# Altium PCB CT310高端控制盒基板电路V1.0.PcbDoc (part 8 of 8)
Units mil, origin at the board's own origin, x right, y up, seen from the top; angles counter-clockwise.
Board outline 8162.61 x 6196.81 mil, 2 copper layers (Top Layer, Bottom Layer), stack 65.792 mil thick; 265 components, 178 nets, 926 pads, 298 vias.
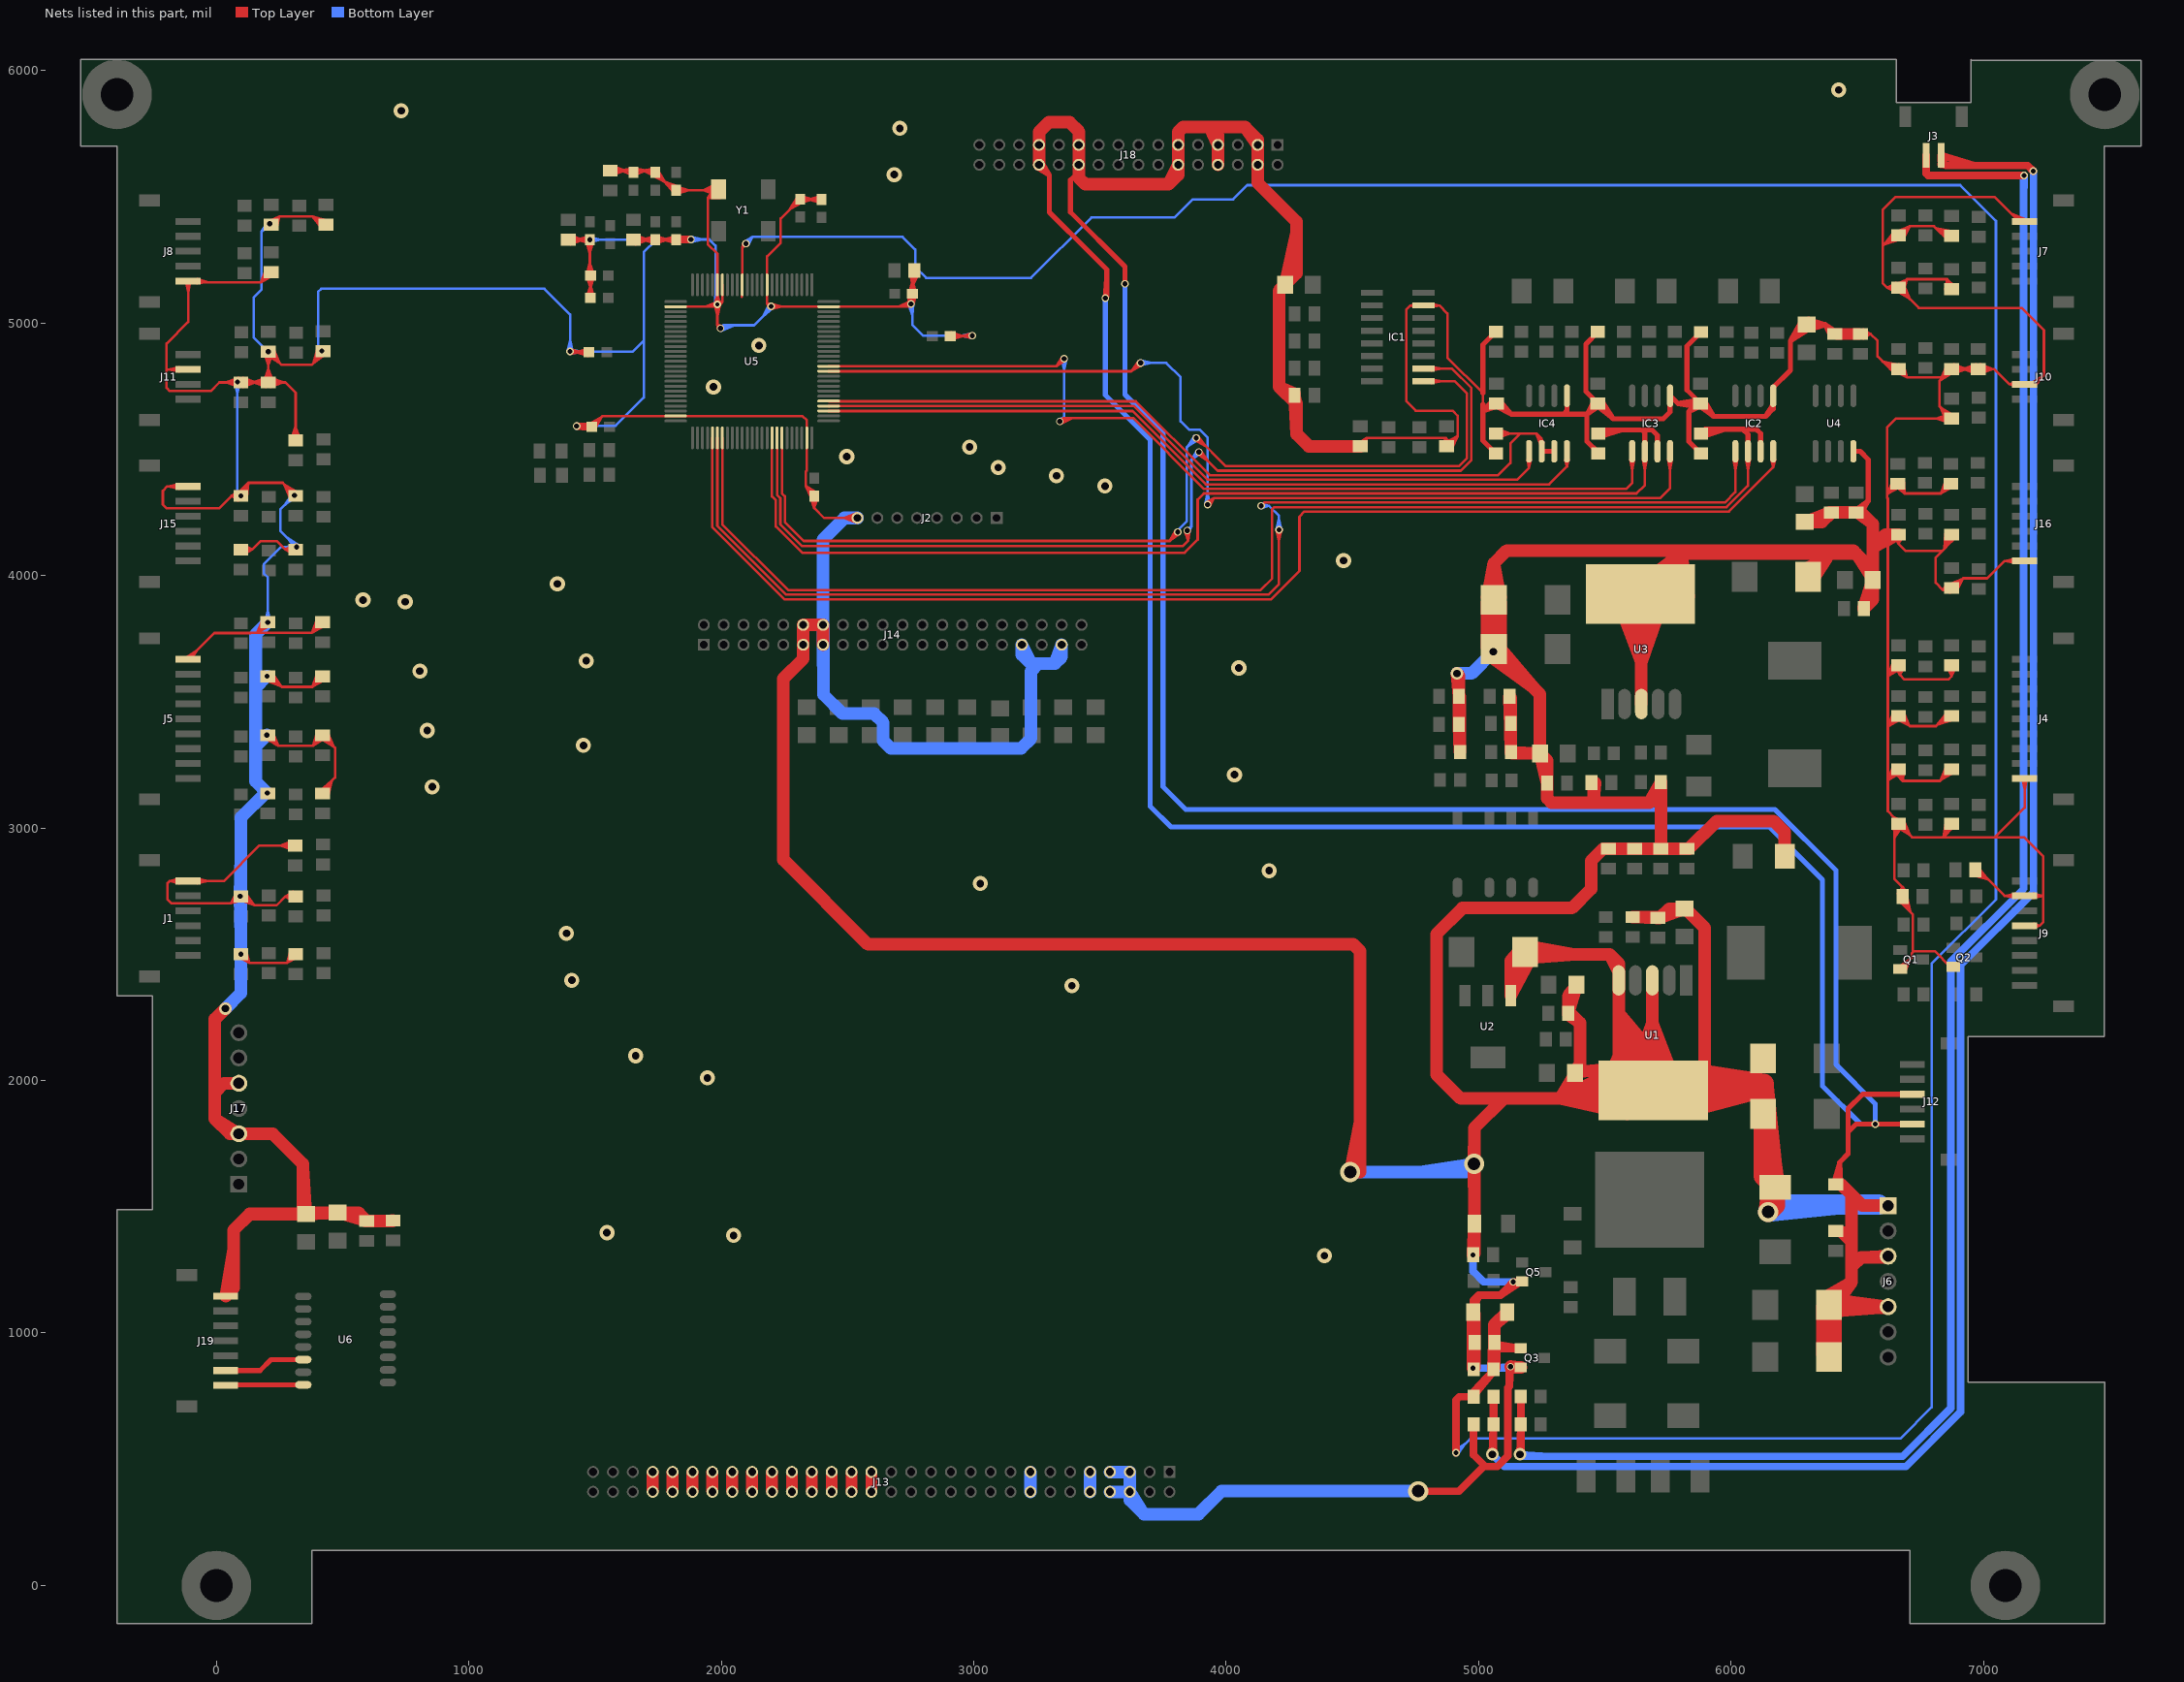
[diagram p8: the nets of this part, all layers, seen from the top]

## Via types
v1: diameter 30, hole 20, Top Layer to Bottom Layer, tented both sides, 226 vias
v2: diameter 60, hole 30, Top Layer to Bottom Layer, tented both sides, 32 vias
v3: diameter 50, hole 30, Top Layer to Bottom Layer, tented both sides, 20 vias
v4: diameter 80, hole 50, Top Layer to Bottom Layer, tented both sides, 10 vias
v5: diameter 50, hole 28, Top Layer to Bottom Layer, tented both sides, 8 vias
v6: diameter 24, hole 16, Top Layer to Bottom Layer, tented both sides, 1 vias
v7: diameter 30, hole 16, Top Layer to Bottom Layer, tented both sides, 1 vias

## Nets (pads, with @x,y where several pads share a name; then routed paths per layer and width w, separated by ;. In a path a pad name is that pad's centre, name@x,y a point inside that pad or via, vN(x,y) a via of type N, cw(c..) or ccw(c..) an arc to the next point about the centre after c; other vN are vias at no path point) (continued)
SGND: (continued)
  Top Layer w50: 68,1328.8 J19.7@36.77,1146.17 ; J17.5@89,1989 30,1989 -6,1953 ; 169.74,1471.02 R1.2@351.24,1471.02 ; 343,1655.06 R1.2@355.17,1471.02 ; C85.2@700,1445.37 C85.2@698,1443.37 ; J14.13@2403.29,3725.69 J14.14@2403.29,3804.43 J14.12@2324.55,3804.43 J14.11@2324.55,3725.69 ; J18.26@3258.48,5626.93 J18.25@3258.48,5705.67 3258.48,5756.48 3297,5795 3380,5795 3417,5758 ; J18.8@3967.15,5626.93 J18.7@3967.15,5705.67 ; C107.2@4270.58,4720.2 4209,4748 ; 4278,5354.59 C112.1@4233.18,5156.23 ; 4351.77,4511.86 C109.2@4525.39,4511.86 ; 4531,1842.29 v4(4491,1637) 4531,1637 4531,2512 4504,2539 2581,2539 2246,2874 2246,3592 2324.55,3670.55 ; C109.2@4531.3,4511.86 4327.14,4511.86 4279,4560 ; D5.1@4978.37,1082.3 D5.1@4983.93,1076.74 ; 4978.72,1025.5 v1(4977.3,860.3) ; D6.1@4983.37,1441.17 4983.37,1618.73 v4(4982,1670) ; 4983.74,1025.39 v1(4977.3,860.3) ; 4983.93,1026.59 v1(4977.3,860.3) ; C72.2@5033.91,3714.95 C70.2@5033.9,3893.58 ; C72.2@5033.9,3718.71 C70.2@5060.02,3903.3 ; C72.2@5033.91,3718.79 C70.2@5060.02,3895.42 ; C70.2@5033.95,3913.67 5060.02,4048.02 ; C72.2@5034.47,3722.59 C70.2@5086.13,3893.58 ; C70.2@5036.91,3872.27 v3(5058,3698) ; C70.2@5036.92,3873.15 v3(5058,3698) ; C72.2@5043.43,3680.87 5218.72,3554.28 ; C72.2@5060.02,3701.13 5218.72,3554.28 ; C70.2@5060.02,3911.17 5060.02,4048.02 ; C72.2@5066.5,3706.5 5243.18,3529.82 C73.2@5243.18,3295.3 ; C72.2@5078.93,3719.23 5218.72,3554.28 ; C70.2@5082.87,3871.52 v3(5058,3698) ; C70.2@5083,3871.47 v3(5058,3698) ; C70.2@5086.08,3913.67 5060.02,4048.02 ; C70.2@5086.13,3883.02 v3(5058,3698) ; C17.2@5122.07,3521.3 C17.2@5128.07,3515.3 ; 5123.37,3477.91 R27.1@5128.07,3304.23 ; 5128.07,3477.85 R27.1@5128.07,3304.23 ; C7.2@5158.66,2507.79 U2.1@5126.85,2335.34 ; C7.2@5158.9,2508.64 U2.1@5126.85,2356.01 ; C7.2@5183.98,2509 5385.96,2498.3 ; C7.2@5184.29,2482.82 5385.96,2498.3 ; C7.2@5187.06,2535 5385.96,2498.3 ; 5195.3,3575.95 v3(5058,3698) ; 5197.39,3569.68 v3(5058,3698) ; 5197.53,3575.47 v3(5058,3698) ; C7.2@5198,2536 5235.7,2498.3 ; 5203.96,3571.7 v3(5058,3698) ; C7.2@5207.45,2489.52 U2.1@5126.85,2356.01 ; C7.2@5208.03,2490.77 U2.1@5126.85,2335.34 ; C73.2@5243.18,3299.23 5243.18,3480.73 ; C74.1@5270.93,3172.39 5270.93,3117.67 ; C4.2@5381.12,2029 5381.12,1950.18 ; C4.2@5381.12,2032.94 5565.85,2050.4 5323.57,1928.3 ; C4.2@5392.41,2052.3 5401.79,2061.67 5401.79,2227.8 ; C6.2@5392.41,2372.3 5355.01,2334.89 ; 5399,1932.3 5381.12,1950.18 ; C75.1@5455.93,3178.3 5455.93,3112.67 ; C75.1@5460.63,3178.09 5455.93,3112.67 ; U3.0@5549.69,3908.6 5644.51,3657.76 ; 5554.63,2186.3 U1.5@5554.63,2361.3 ; U1.0@5584.24,2003.53 5323.57,1928.3 ; U1.0@5588.17,1868.3 5323.57,1928.3 ; U1.0@5594.7,1918.22 5323.57,1928.3 ; U3.0@5598.25,3921.9 5644.51,3657.76 ; U1.0@5599.41,1976.32 5687.96,2229.43 ; U1.0@5601.86,1935.39 5554.63,2265.77 ; U3.3@5644.51,3490.9 5644.51,3922.57 U3.0@5641.17,3925.9 ; U3.3@5644.51,3525.9 5644.51,3700.9 ; U1.0@5648.28,1964.23 5687.96,2229.43 ; U1.0@5650.91,1946.22 5554.63,2265.77 ; U3.0@5665.13,3981.79 5802.33,4087.06 ; U3.0@5684.18,3922.97 5644.51,3657.76 ; 5687.96,2186.3 U1.3@5687.96,2361.3 ; U1.3@5687.96,2396.3 U1.0@5687.96,1964.63 ; U3.0@5701.69,3946.42 5802.33,4087.06 ; U1.0@5709.3,1979.3 5849,1979.3 5896,2026.3 5896,2604.07 ; C14.1@5721.63,2917.67 5721.67,3145.67 ; 5721.67,3004.74 R36.2@5721.67,3178.36 ; 5721.67,3091.29 C14.1@5721.63,2917.67 ; R36.2@5721.67,3182.3 5721.67,3145.67 ; U1.0@5729.4,1981.45 5554.63,2265.77 ; U3.0@5733.06,3910.87 5644.51,3657.76 ; U1.0@5734.22,1965.29 5687.96,2229.43 ; U3.0@5739.6,3925.9 5802.33,4087.06 ; U1.0@5770.09,2010.9 5554.63,2265.77 ; U3.0@5781.41,3915.39 5802.33,4087.06 ; U1.0@5782.78,1978.6 5687.96,2229.43 ; C2.1@5820.23,2680.41 5896,2604.07 ; C13.1@5831.2,2917.67 5943.51,3027.51 ; U3.0@5832.26,3916.73 5802.33,4087.06 ; D7.1@6211.97,2887.3 6211.97,2984.03 ; D7.1@6211.97,2897.14 6211.97,2984.03 ; C8.2@6290.43,4024.64 6376.3,4066.3 ; C8.2@6296.34,3986.34 6376.3,4066.3 ; C8.2@6304.98,4002.87 6376.3,4066.3 ; C8.2@6324.9,3985.88 6376.3,4066.3 ; C19.2@6361.16,1101.62 C20.2@6387.28,912.87 ; C19.2@6361.16,1101.69 C20.2@6387.28,905 ; C19.2@6361.16,1105.22 C20.2@6361.16,914.6 ; C19.2@6361.65,1098.06 C20.2@6413.4,914.6 ; C19.2@6371.83,1140.31 6476.82,1200.84 ; C19.2@6387.28,1119.17 6476.82,1200.84 ; C19.2@6387.51,1085.12 J6.5@6589.42,1100 ; C19.2@6390.43,1137.29 J6.5@6589.42,1100 ; C20.2@6392.13,909.85 C20.2@6396.98,905 ; C19.2@6398.57,1100 J6.5@6617,1100 ; C19.2@6406.91,1101.84 6476.82,1200.84 ; C19.2@6412.91,1098.06 C20.2@6361.16,914.6 ; C19.2@6413.4,1101.62 C20.2@6387.28,912.87 ; C19.2@6413.4,1105.22 C20.2@6413.4,914.6 ; C19.2@6413.4,1101.69 C20.2@6387.28,905 ; C22.1@6414.3,1588.67 6435.37,1588.67 6476.82,1547.22 ; C19.2@6433.28,1129.26 J6.5@6622,1104 ; C19.2@6434.54,1108.65 J6.5@6622,1104 ; C19.2@6438.25,1088.86 J6.5@6622,1104 ; C19.2@6438.33,1100 J6.5@6622,1104 ; C21.1@6439.74,1399.3 6476.82,1362.22 ; C81.1@6501.61,4249.58 6561.02,4203.98 ; C68.1@6525.67,3868.3 6561.02,3903.65 ; J6.3@6617,1300 6515.82,1300 ; J6.3@6622,1304 6515.82,1300 ; J6.1@6622,1504 6520.04,1504 6476.82,1547.22 ; C54.2@6663.3,4161.49 6620.77,4161.49 ; -6,1848 J17.3@89,1789 ; -6,1848 -6,1953 ; -6,1848 53,1789 ; -6,1953 -6,2243 ; -6,2243 v3(36,2285) -6,2243 ; J19.7@36.77,1146.17 68,1177.39 ; J19.7@36.77,1146.17 68,1177.39 ; 53,1789 J17.3@89,1789 ; 53,1789 J17.3@89,1789 ; 68,1177.39 68,1407 132.02,1471.02 R1.2@355.17,1471.02 ; J17.3@89,1789 223,1789 343,1669 343,1483.19 R1.2@355.17,1471.02 ; R1.2@355.17,1471.02 R1.2@360.27,1476.12 ; R1.2@360.27,1476.12 477.06,1476.12 359.11,1471.02 R37.2@481,1476.12 ; R1.2@360.27,1476.12 R37.2@481,1476.12 ; R37.2@481,1476.12 C76.2@590.09,1443.37 ; R37.2@481,1476.12 563.25,1476.12 ; 563.25,1476.12 484.94,1476.12 C76.2@590.09,1443.37 ; 563.25,1476.12 C76.2@590.09,1443.37 ; 563.25,1476.12 C76.2@590.09,1443.37 ; 563.25,1476.12 C76.2@596,1443.37 ; C76.2@596,1443.37 694.09,1445.37 601.91,1443.37 C85.2@698,1443.37 ; C76.2@596,1443.37 C85.2@698,1443.37 ; 2324.55,3670.55 J14.11@2324.55,3725.69 ; 2324.55,3670.55 J14.11@2324.55,3725.69 ; J18.21@3415.96,5705.67 3417,5758 ; J18.21@3415.96,5705.67 3417,5706.7 3417,5758 ; J18.21@3415.96,5705.67 J18.22@3415.96,5626.93 3415.96,5575.04 3442,5549 3772,5549 ; 3772,5549 J18.12@3809.66,5626.93 ; 3772,5549 3809.66,5586.66 ; 3809.66,5586.66 J18.12@3809.66,5626.93 ; 3809.66,5586.66 J18.12@3809.66,5626.93 ; J18.12@3809.66,5626.93 J18.11@3809.66,5705.67 3809.66,5756.66 3829,5776 3934,5776 ; 3934,5776 J18.7@3967.15,5705.67 ; 3934,5776 4075,5776 ; 3934,5776 3967.15,5742.85 ; J18.7@3967.15,5705.67 3967.15,5742.85 ; J18.7@3967.15,5705.67 3967.15,5742.85 ; 4075,5776 J18.3@4124.63,5705.67 ; 4075,5776 4124.63,5726.37 J18.3@4124.63,5705.67 ; J18.3@4124.63,5705.67 J18.4@4124.63,5626.93 4124.63,5555.37 4278,5402 4278,5197.12 ; 4209,4748 4209,5128.12 C112.1@4233.18,5152.3 4278,5197.12 ; 4209,4748 4279,4678 ; C112.1@4233.18,5156.23 4278,5197.12 ; C112.1@4233.18,5156.23 4278,5197.12 ; C107.2@4270.58,4708.39 4279,4678 ; C107.2@4270.58,4708.39 4279,4560 ; C107.2@4270.58,4708.39 4279,4678 ; 4279,4560 4279,4678 ; v3(4914,3612) 4922.07,3527.2 v3@4922.07,3603.93 ; v3(4914,3612) C18.2@4922.07,3521.3 v3@4922.07,3603.93 ; v3(4914,3612) v3@4922.07,3603.93 ; C16.2@4922.07,3416.21 C18.2@4922.07,3515.39 ; C16.2@4922.07,3416.21 C18.2@4922.07,3515.39 ; C16.2@4922.07,3416.21 4926.01,3478.84 ; C16.2@4922.07,3416.21 4926.01,3521.3 R28.1@4926.01,3301.28 4922.07,3404.4 4926.01,3305.22 4926.01,3478.84 ; C18.2@4922.07,3515.39 4926.01,3478.84 ; C18.2@4922.07,3515.39 4926.01,3341.57 C18.2@4922.07,3515.39 ; C18.2@4922.07,3515.39 4926.01,3478.84 ; v1(4977.3,860.3) C5.1@4983.93,956.39 ; v1(4977.3,860.3) C5.1@4983.93,956.39 ; v1(4977.3,860.3) D5.1@4978.37,1074.42 ; v1(4977.3,860.3) 4983.93,896.5 D5.1@4978.37,1074.42 ; v1(4977.93,1309.3) D6.1@4983.37,1425.42 ; v1(4977.93,1309.3) D6.1@4983.37,1425.42 ; v1(4977.93,1309.3) D6.1@4983.37,1433.3 ; v1(4977.93,1309.3) D6.1@4983.37,1433.3 ; v1(4977.93,1309.3) C12.1@4983.37,1314.74 ; D5.1@4978.37,1074.42 R11.1@4979.93,859.54 ; D5.1@4978.37,1074.42 4983.93,1033.44 R11.1@4979.93,859.54 ; D5.1@4978.37,1074.42 4983.93,968.2 D5.1@4983.93,1076.74 ; R11.1@4979.93,859.54 C5.1@4983.93,956.39 ; v4(4982,1670) 4983.37,1479.98 v4(4982,1670) ; v4(4982,1670) 4983.37,1812.37 ; C12.1@4983.37,1314.74 D6.1@4983.37,1425.42 ; C12.1@4983.37,1314.74 D6.1@4983.37,1433.3 ; D6.1@4983.37,1425.42 4977.93,1315.2 D6.1@4983.37,1433.3 ; D6.1@4983.37,1433.3 4983.37,1812.37 ; 4983.37,1812.37 5099.3,1928.3 ; C5.1@4983.93,956.39 4983.93,861.3 D5.1@4983.93,1076.74 ; C70.2@5033.9,3893.58 v3(5058,3698) ; C70.2@5033.9,3893.58 v3(5058,3698) ; C70.2@5033.9,3893.58 C72.2@5060.02,3716.87 ; C70.2@5033.9,3893.58 5085.57,3722.59 v3(5058,3698) ; C70.2@5033.9,3893.58 C72.2@5060.02,3709 ; v3(5058,3698) 5060.02,3873.25 v3(5058,3698) ; v3(5058,3698) C70.2@5060.02,3895.42 ; v3(5058,3698) 5086.13,3718.79 C70.2@5060.02,3895.42 ; v3(5058,3698) C70.2@5060.02,3895.42 ; v3(5058,3698) C70.2@5086.13,3893.58 ; v3(5058,3698) C70.2@5060.02,3903.3 ; v3(5058,3698) 5086.13,3718.71 C70.2@5060.02,3903.3 ; v3(5058,3698) C70.2@5060.02,3903.3 ; v3(5058,3698) 5060.02,3873.11 v3(5058,3698) ; v3(5058,3698) 5086.13,3714.95 C70.2@5086.13,3893.58 ; C72.2@5060.02,3709 C70.2@5060.02,3895.42 ; C72.2@5060.02,3709 C70.2@5086.13,3893.58 ; C72.2@5060.02,3709 C70.2@5060.02,3903.3 ; C72.2@5060.02,3716.87 C70.2@5060.02,3895.42 ; C72.2@5060.02,3716.87 C70.2@5086.13,3893.58 ; C72.2@5060.02,3716.87 C70.2@5060.02,3903.3 ; C70.2@5060.02,3903.3 5060.02,4048.02 ; 5060.02,4048.02 5111,4099 6483.59,4099 6495.54,4087.06 ; 5099.3,1928.3 4928.7,1928.3 4833,2024 4833,2580 4936,2683 5370,2683 5445.3,2758.3 5445.3,2869.74 5493.22,2917.67 C11.1@5514.3,2917.67 ; 5099.3,1928.3 5658.3,1928.3 U1.0@5691.3,1961.3 ; v1(5126.3,866.3) Q3.2@5163.11,863.8 ; v1(5126.3,866.3) Q3.2@5163.11,863.8 ; v1(5126.3,866.3) Q3.2@5167.05,863.8 v1@5128.8,863.8 ; v1(5126.3,866.3) Q3.2@5163.11,863.8 ; v1(5126.3,866.3) v1@5128.8,863.8 ; U2.1@5126.85,2335.34 C7.2@5183.98,2501.13 ; U2.1@5126.85,2335.34 5126.85,2474.85 ; U2.1@5126.85,2356.01 C7.2@5183.98,2501.13 ; U2.1@5126.85,2356.01 5126.85,2474.85 ; 5126.85,2474.85 C7.2@5183.98,2501.13 ; 5126.85,2474.85 5168.33,2522.11 5126.85,2474.85 ; 5126.85,2474.85 5189.73,2475.58 5126.85,2474.85 ; 5126.85,2474.85 C7.2@5183.98,2501.13 ; C15.2@5127.07,3407.39 R27.1@5128.07,3304.23 ; C15.2@5127.07,3407.39 R27.1@5128.07,3304.23 ; C15.2@5127.07,3407.39 5128.07,3341.2 ; C15.2@5127.07,3407.39 R27.1@5128.07,3300.3 ; R27.1@5128.07,3300.3 C73.2@5243.18,3295.3 ; R27.1@5128.07,3300.3 5133.07,3295.3 C73.2@5243.18,3295.3 ; R27.1@5128.07,3300.3 C17.2@5128.07,3515.3 ; R27.1@5128.07,3304.23 5128.07,3341.2 ; R27.1@5128.07,3304.23 5128.07,3341.2 ; 5128.07,3341.2 5122.07,3515.39 5127.07,3419.2 C17.2@5128.07,3515.3 ; v1@5128.8,863.8 Q3.2@5163.11,863.8 ; v1@5128.8,863.8 Q3.2@5163.11,863.8 ; C7.2@5183.98,2501.13 5235.7,2498.3 ; C7.2@5183.98,2501.13 5235.7,2498.3 ; 5235.7,2498.3 5189.21,2475.47 5235.7,2498.3 ; 5235.7,2498.3 5191.98,2526.06 5235.7,2498.3 ; 5235.7,2498.3 5519.3,2498.3 ; C73.2@5243.18,3295.3 C73.2@5270.93,3267.55 ; 5270.93,3117.67 5289.3,3099.3 5469.3,3099.3 ; 5270.93,3117.67 C74.1@5270.93,3178.3 ; C74.1@5270.93,3178.3 5243.18,3291.36 5270.93,3184.2 C73.2@5270.93,3267.55 ; C74.1@5270.93,3178.3 C73.2@5270.93,3267.55 ; 5323.57,1928.3 5381.12,2025.06 5381.12,1950.18 ; 5323.57,1928.3 U1.0@5592.87,1961.3 ; C9.1@5355.01,2266.3 C6.2@5387.12,2375.06 ; C9.1@5355.01,2266.3 5363.3,2266.3 5401.79,2227.8 ; C9.1@5355.01,2266.3 5355.01,2334.89 ; 5355.01,2334.89 C6.2@5387.12,2375.06 ; 5355.01,2334.89 C6.2@5387.12,2375.06 ; 5355.01,2334.89 C6.2@5387.12,2375.06 ; 5355.01,2334.89 5355.01,2272.2 C6.2@5387.12,2375.06 ; 5401.79,2227.8 5355.01,2260.39 5401.79,2227.8 ; 5455.93,3112.67 5469.3,3099.3 ; 5469.3,3099.3 5675.3,3099.3 ; C11.1@5514.3,2917.67 5612.06,2917.67 5520.2,2917.67 C10.1@5617.96,2917.67 ; C11.1@5514.3,2917.67 C10.1@5617.96,2917.67 ; 5519.3,2498.3 U1.5@5554.63,2431.3 ; 5519.3,2498.3 5554.63,2462.96 ; 5554.63,2097.96 U1.0@5592.87,1961.3 ; 5554.63,2097.96 5632.14,1979.08 5554.63,2097.96 ; 5554.63,2097.96 5550.07,1956.12 5554.63,2097.96 ; 5554.63,2097.96 5669.34,2014.41 5554.63,2097.96 ; 5554.63,2097.96 5499.94,1967.01 5554.63,2097.96 ; 5554.63,2097.96 U1.0@5592.87,1961.3 ; 5554.63,2097.96 U1.0@5687.96,1964.63 ; 5554.63,2097.96 U1.5@5554.63,2396.3 5554.63,2462.96 ; 5554.63,2265.77 U1.0@5691.3,1961.3 ; U1.5@5554.63,2431.3 5554.63,2462.96 ; U1.5@5554.63,2431.3 5554.63,2462.96 ; C10.1@5617.96,2917.67 5715.72,2917.67 5623.87,2917.67 C14.1@5721.63,2917.67 ; C10.1@5617.96,2917.67 C14.1@5721.63,2917.67 ; U3.0@5641.17,3925.9 5644.51,3657.76 ; U3.0@5641.17,3925.9 5802.33,4087.06 ; 5675.3,3099.3 R36.2@5721.67,3178.36 ; 5675.3,3099.3 5721.67,3145.67 ; U1.0@5687.96,1964.63 U1.0@5691.3,1961.3 ; 5687.96,2229.43 U1.0@5691.3,1961.3 ; C3.1@5716.2,2643.67 5812.36,2680.41 5755.27,2680.41 ; C3.1@5716.2,2643.67 5755.27,2680.41 ; C3.1@5716.2,2643.67 C2.1@5816.29,2680.41 ; C3.1@5716.2,2643.67 5755.27,2680.41 ; 5721.67,3145.67 R36.2@5721.67,3178.36 ; 5721.67,3145.67 R36.2@5721.67,3178.36 ; 5721.67,3145.67 R36.2@5721.67,3178.36 ; C3.1@5721.8,2646.95 5613.53,2646.95 5704.39,2643.67 R3.1@5609.6,2646.95 C3.1@5721.8,2646.95 ; C3.1@5721.8,2646.95 5755.27,2680.41 ; 5755.27,2680.41 C2.1@5816.29,2680.41 ; 5802.33,4087.06 6495.54,4087.06 ; C2.1@5816.29,2680.41 5819.66,2680.41 5896,2604.07 ; C13.1@5833.67,2917.67 5727.53,2917.67 5819.39,2917.67 C14.1@5721.63,2917.67 C13.1@5833.67,2917.67 ; C13.1@5833.67,2917.67 5943.51,3027.51 ; 5943.51,3027.51 6168.49,3027.51 6211.97,2984.03 ; 6359.3,4212.18 C80.1@6390.8,4249.58 ; 6359.3,4212.18 C80.1@6390.8,4249.58 ; 6359.3,4212.18 C80.1@6390.8,4249.58 ; 6359.3,4212.18 6295.64,4212.18 C80.1@6390.8,4249.58 ; 6359.3,4212.18 C80.1@6396.7,4249.58 ; 6359.3,4212.18 C79.1@6291.7,4212.18 C80.1@6390.8,4249.58 ; C20.2@6361.16,914.6 C19.2@6387.28,1103.42 ; C20.2@6361.16,914.6 C19.2@6387.28,1111.3 ; C20.2@6387.28,905 C19.2@6387.28,1103.42 ; C20.2@6387.28,905 C19.2@6387.28,1111.3 ; C20.2@6387.28,912.87 C19.2@6387.28,1103.42 ; C20.2@6387.28,912.87 C19.2@6387.28,1111.3 ; C19.2@6387.28,1103.42 C20.2@6413.4,914.6 ; C19.2@6387.28,1111.3 J6.5@6589.42,1100 ; C19.2@6387.28,1111.3 C20.2@6413.4,914.6 ; C19.2@6387.28,1111.3 6476.82,1200.84 ; C80.1@6396.7,4249.58 6489.8,4249.58 6402.61,4249.58 C81.1@6495.7,4249.58 ; C80.1@6396.7,4249.58 C81.1@6495.7,4249.58 ; 6476.82,1200.84 6476.82,1261 ; 6476.82,1261 6515.82,1300 ; 6476.82,1261 6476.82,1362.22 ; 6476.82,1362.22 6476.82,1547.22 ; 6495.54,4087.06 C53.2@6561.02,3985.35 ; 6495.54,4087.06 6561.02,4021.57 ; C81.1@6495.7,4249.58 6497.8,4249.58 6515.42,4249.58 6561.02,4203.98 ; C68.1@6525.67,3874.2 6561.02,3903.65 ; C68.1@6525.67,3874.2 6561.02,3977.48 6561.02,3903.65 ; C68.1@6525.67,3874.2 6561.02,3903.65 ; C68.1@6525.67,3874.2 6561.02,3903.65 ; C68.1@6525.67,3874.2 C53.2@6561.02,3981.42 ; 6561.02,3903.65 C53.2@6561.02,3981.42 ; C53.2@6561.02,3981.42 6561.02,4021.57 ; C53.2@6561.02,3985.35 6561.02,4021.57 ; C53.2@6561.02,3985.35 6561.02,4112.02 ; C53.2@6561.02,3985.35 6561.02,4021.57 ; C53.2@6561.02,3985.35 6561.02,4021.57 ; 6561.02,4021.57 6561.02,4112.02 ; 6561.02,4112.02 C54.2@6657.39,4161.49 ; 6561.02,4112.02 6561.02,4203.98 ; 6561.02,4112.02 6610.49,4161.49 ; 6610.49,4161.49 C54.2@6657.39,4161.49 ; 6610.49,4161.49 C54.2@6657.39,4161.49 ; 6610.49,4161.49 6620.77,4161.49 ; 6620.77,4161.49 C54.2@6657.39,4161.49 ; 6620.77,4161.49 C54.2@6657.39,4161.49
  Top Layer w80: U1.0@5789.72,1961.3 6129.64,1979.3 ; U1.0@5794.57,2039.26 6129.64,1979.3 ; U1.0@5802.77,1884.28 6129.64,1979.3 ; U1.0@5842.21,2030.73 6129.64,1987.17 ; U1.0@5848,1897.43 6129.64,1971.42 ; U1.0@5849,1979.3 6129.64,1979.3 ; 6129.64,1680.24 6129.64,1971.42 ; 6160.22,1679.43 6129.64,1971.42 ; D4.1@6160.52,1577.25 v4(6147,1479) ; 6129.64,1971.42 6129.64,1901.35 D4.1@6174.3,1577.25 ; 6129.64,1979.3 6129.64,1621.9 D4.1@6174.3,1577.25 ; v4(6147,1479) D4.1@6174.3,1577.25 ; v4(6147,1479) D4.1@6174.3,1577.25 ; v4(6147,1479) D4.1@6174.3,1577.25 ; v4(6147,1479) v4@6174.3,1506.3 ; v4@6174.3,1506.3 D4.1@6174.3,1577.25 ; v4@6174.3,1506.3 D4.1@6174.3,1577.25 ; v4@6174.3,1506.3 D4.1@6174.3,1577.25
  Bottom Layer w10: v1@74.02,4766.33 82,4721.86 ; v1@88.81,4310.35 82,4330.93 ; v1@93.88,4765.45 82,4721.86 ; v1@102.57,4324.11 82,4330.93 ; v1@193.71,3815.78 203.65,3859.67 v1@213.59,3815.78 ; v1@203.39,5399.49 178,5362 ; v1(203.65,3814.67) 203.65,3992.75 188.07,4008.33 188.07,4044.07 257,4113 v1(318,4113) 253,4178 253,4261 v1(309,4317) 272.79,4280.79 ; v1(205.65,4886.93) 202.88,4886.93 147.33,4942.47 147.33,5101.46 178,5132.12 178,5362 ; v1@217,5385 178,5362 ; v1@301.27,4323.35 272.79,4280.79 ; v1@310.27,4106.65 281.79,4149.21 v1@324.35,4120.73 ; v1@315.35,4309.27 272.79,4280.79 ; v1@316.89,4103.06 273,4113 v1@316.89,4122.94 ; v1(418,4889) 403,4904 403,5124 415,5136 1299,5136 1401,5034 v1(1401,4887) 1650,4887 1693,4930 ; v1@1391.06,4888.11 1401,4932 v1@1410.94,4888.11 ; v1@1402.11,4877.06 1446,4887 v1@1402.11,4896.94 ; v1@1427.89,4601.96 1472.03,4593 ; v1@1428.33,4582.09 1472.03,4593 ; v1(1479.3,5329.92) 1741.92,5329.92 ; v1@1480.41,5319.99 1524.3,5329.92 v1@1480.41,5339.86 ; v1@1878.89,5321.06 1835,5331 v1@1878.89,5340.94 ; v1@1881.11,5321.06 1925,5331 v1@1881.11,5340.94 ; v7@1974.51,5072.77 1977,5121.07 ; v7@1994.17,5075.86 1977,5121.07 ; v1@1995.7,4988.92 2050.06,4991 ; v1@2000.09,4969.49 2050.06,4991 ; v1@2188.61,5071.44 2165.23,5026.23 ; v1@2204.16,5059.02 2165.23,5026.23 ; v1@2741.31,5073.55 2757.63,5029.38 ; v1@2760.99,5076.35 2757.63,5029.38 ; v1@2992.89,4940.06 2949,4950 v1@2992.89,4959.94 ; v1(2994,4950) 2799,4950 2757.63,4991.37 2757.63,5069.37 v1(2751,5076) 2757.63,5029.38 ; 82,4330.93 v1(97.33,4315.6) 82,4330.93 ; 82,4330.93 82,4765 v1(84,4767) 82,4721.86 ; 178,5362 v1(211,5393) 211,5395 178,5362 ; 1472.03,4593 v1(1427,4592) 1428,4593 1581,4593 1693,4705 1693,4930 ; 1693,4930 1693,5281 1741.92,5329.92 ; 1741.92,5329.92 1743,5331 v1(1880,5331) 1952,5331 1977,5306 1977,5080.8 v7(1984.5,5073.3) 1977,5121.07 ; 2050.06,4991 v1(1997,4979) 2009,4991 2130,4991 2188,5049 ; 2165.23,5026.23 v1(2197,5066) ; 2188,5049 v1(2197,5066) ; 2188,5049 2187.25,5068.22 2188,5049 ; 2188,5049 2204.32,5059.18 2188,5049 ; 2188,5049 v1(2197,5066) ; 2188,5049 2188,5066 v1(2197,5066)
  Bottom Layer w20: 3521,5024 v1(3521,5099) 3521,4715 3699,4537 3699,3086 3781,3004 6153,3004 6362,2795 6362,1978.19 6513.19,1827 ; 3599,5080 v1(3599,5155) 3599,4717 3750,4566 3750,3163 3840,3073 6174,3073 6415,2832 6415,2063 6571,1907 v1(6571,1827.42) 6513.19,1827 ; v1@6563,1827 6513.19,1827
  Bottom Layer w30: v1(4977.3,860.3) v1@5120.3,860.3 ; v1(4977.93,1309.3) 4977.93,1244.07 5019.7,1202.3 v1(5137.3,1202.3) ; 5019.8,860.3 v1(5126.3,866.3)
  Bottom Layer w50: v3(36,2285) 97.33,2346.33 v1(97.33,2500.42) 97.33,3041.67 v1@193.66,3138 ; 97.33,2564.68 v1(94,2730) 97.33,2895.33 ; 2405,3552.01 J14.13@2403.29,3725.69 ; J13.8@3539.44,370.69 J13.6@3618.18,370.69 ; J13.7@3539.44,449.43 J13.5@3618.18,449.43 J13.6@3618.18,370.69 ; v4(4491,1637) 4949,1637 v4(4982,1670) 4767.89,1637 ; v4(4761,373) 3981,373 3890,282 3674,282 ; v3(4914,3612) 4972,3612 v3(5058,3698) ; 155.65,3184.35 v1(202,3138) 155.65,3184.35 ; 155.65,3184.35 155.65,3323.65 ; 155.65,3323.65 v1(200,3368) 155.65,3323.65 ; 155.65,3323.65 155.65,3555.65 ; 155.65,3555.65 v1(201,3601) 155.65,3555.65 ; 155.65,3555.65 155.65,3766.67 ; 155.65,3766.67 v1(203.65,3814.67) 155.65,3766.67 ; J14.13@2403.29,3725.69 J14.14@2403.29,3804.43 ; J14.13@2403.29,3725.69 2405,3630.75 J14.14@2403.29,3804.43 ; J14.13@2403.29,3725.69 J14.14@2405,3802.71 ; J14.14@2403.29,3804.43 2403.29,4143.29 2488,4228 ; J14.14@2403.29,3804.43 J14.14@2405,3802.71 ; J14.14@2405,3802.71 2405,3528 2480,3453 2606,3453 2641.5,3417.5 2641.5,3345.5 2671,3316 3188,3316 3227,3355 3227,3621 3257,3651 ; 2488,4228 J2.8@2539.41,4228 2488,4228 ; 3190.69,3686.31 J14.33@3190.69,3725.69 ; 3190.69,3686.31 3226,3651 ; 3190.69,3686.31 J14.33@3190.69,3725.69 ; J14.33@3190.69,3725.69 3226,3651 ; 3226,3651 3257,3651 ; 3257,3651 3322,3651 ; 3322,3651 J14.37@3348.17,3725.69 ; 3322,3651 3348.17,3677.17 ; 3348.17,3677.17 J14.37@3348.17,3725.69 ; 3348.17,3677.17 J14.37@3348.17,3725.69 ; 3618.18,337.82 J13.6@3618.18,370.69 ; 3618.18,337.82 3674,282 ; 3618.18,337.82 J13.6@3618.18,370.69 ; J13.6@3618.18,370.69 3674,282
  Bottom Layer w80: 6446.04,1509 v4(6147,1479) 6177,1509 6585,1509
  other v2: 4389,1306 2049,1386 1547,1397 1945,2010 1661,2098 3389,2375 1408,2397 1387,2583 3026,2780 4170,2831 855,3163 4033,3211 1454,3327 835,3386 806,3621 4050,3634 1465,3662 748,3896 581,3903 1351,3967 4465,4059 3520,4354 3328,4395 3097,4428 2497,4471 2984,4509 1969,4747 2149,4911 2685,5588 2707,5771 732,5841 6426,5923
SPEED: J13.15 J13.16 | length 78.7
  Bottom Layer w50: J13.16@3224.48,370.69 J13.15@3224.48,449.43
SW+: J3.1 R9.1 R18.1 | length 8466.6
  Top Layer w30: R18.1@5166.93,634.44 v3(5164,519) 5166.93,634.36 5166.93,538.07 R18.1@5166.93,638.3 ; J3.1@6772.47,5628.8 6772.47,5592.53 ; J3.1@6772.47,5664.23 6772.47,5592.53 ; 7054.97,5585 v1(7160,5584) ; v1@7159,5585 6780,5585 6772.47,5592.53 ; R18.1@5166.93,638.3 5166.93,744.36 5166.93,642.23 R9.1@5166.93,748.3 R18.1@5166.93,638.3
  Bottom Layer w30: 5280.73,511 v3(5164,519) 5172,511 6679.26,511 6870.46,702.2 6870.46,2471.2 7159,2759.74 v1@7159,5584 ; 7159,5478.97 v1(7160,5584)
SW-: J3.2 R10.1 R19.2 | length 8495.5
  Top Layer w30: R19.2@5058.67,638.3 v3@5058.67,523.67 ; 6962.53,5624 J3.2@6831.53,5664.23 6831.53,5643.47 6851,5624 ; v3(5054,519) R19.2@5058.67,634.33 ; v3(5054,519) R19.2@5058.67,634.33 ; v3(5054,519) v3@5058.67,523.67 ; v3@5058.67,523.67 R19.2@5058.67,634.36 ; 6851,5624 6831.53,5628.8 6851,5624 ; 6851,5624 7175,5624 ; 7175,5624 v1(7197,5602) 7175,5624 ; R19.2@5058.67,642.23 5058.67,743.01 5060.67,638.3 5060.67,748.3 R19.2@5058.67,642.23
  Bottom Layer w30: v3(5054,519) 5102,471 6693,471 6908.46,686.46 6908.46,2455.46 7198,2745 7198,5601 v1(7197,5602)
SWADC: C5.2 D5.2 Q3.1 R10.2 R11.2 U5.15 | length 14399.1
  Top Layer w10: U5.15@2081.99,5150.51 2081.99,5104.43 U5.15@2082.93,5112.19 ; U5.15@2082.93,5151.44 2082.93,5299.93 ; U5.15@2082.93,5190.69 2082.93,5226.44 ; v1@2089.47,5320.22 2082.93,5299.93 ; v1@2103.22,5306.47 2082.93,5299.93 ; 2082.93,5299.93 v1(2098,5315) 2082.93,5299.93
  Top Layer w30: v1(4910,525) 4910,734 4922.95,746.95 R10.2@4979.93,746.95 ; R10.2@4981.93,748.3 R10.2@4981.93,768.93 ; R11.2@5056.41,849.24 4979.93,750.89 R11.2@5058.67,845.67 ; R11.2@5058.67,851.67 R10.2@4981.93,768.93 ; R11.2@5058.67,857.3 R11.2@5058.67,845.67 ; C5.2@5062.67,962.3 C5.2@5086.17,938.8 ; R10.2@4981.93,768.93 R11.2@5058.67,845.67 ; C5.2@5086.17,938.8 5163.11,938.8 5062.67,956.39 Q3.1@5167.05,938.8 C5.2@5086.17,938.8
  Top Layer w50: R11.2@5058.67,857.3 R11.2@5062.67,861.3 ; C5.2@5062.67,968.2 5062.67,1032.74 ; D5.2@5112.22,1074.42 5062.67,1032.74 ; D5.2@5112.22,1082.3 5062.67,1032.74 ; R11.2@5062.67,861.3 5062.67,956.39 5058.67,859.54 C5.2@5062.67,962.3 ; R11.2@5062.67,861.3 C5.2@5062.67,962.3 ; C5.2@5062.67,962.3 5062.67,1032.74
  Bottom Layer w10: v1@2091.96,5322.97 2124,5341 ; v1(2098,5315) 2124,5341 ; v1@2105.97,5308.96 2124,5341 ; v1@4903.65,532.73 4946.21,561.21 v1@4917.73,518.65 ; v1(4910,525) 4967,582 6671,582 6794.46,705.46 6794.46,2462.46 7049,2717 7049,5404.55 6907.55,5546 4083.2,5546 4027.2,5490 3867,5490 3795,5418 3466.4,5418 3227.4,5179 2810.89,5179 2768,5221.89 2768,5291.09 2718.09,5341 2124,5341
TX+: J19.1 U6.16 | length 457.6
  Top Layer w20: J19.1@36.77,791.83 39.44,794.5 U6.16@344.42,794.5 ; J19.1@72.2,791.83 146.04,794.5 ; 251.94,794.5 U6.16@326.9,794.5
TX-: J19.2 U6.14 | length 474.4
  Top Layer w20: J19.2@36.77,850.89 172.89,850.89 216.5,894.5 U6.14@344.42,894.5 ; J19.2@72.2,850.89 145.98,850.89 ; 251.94,894.5 U6.14@326.9,894.5
UART1_R: IC1.9 U5.69 | length 4534.4
  Top Layer w10: 2240.41,4470.15 U5.69@2240.41,4505.9 ; U5.69@2240.41,4545.15 2240.41,4325.15 2252,4313.56 2252,4211 2326,4137 3777,4137 ; v1@3799.85,4177.79 3777,4137 ; v1@3814.73,4164.61 3777,4137 ; v1@3875.2,4536.85 3919.59,4511.41 ; v1@3888.27,4551.86 3919.59,4511.41 ; IC1.9@4781.66,4769.3 4905.7,4769.3 4953,4722 4953,4464 4922,4433 3998,4433 3886,4545 v1(3881,4545) 3919.59,4511.41 ; IC1.9@4813.15,4769.3 4854.96,4769.3 ; IC1.9@4813.71,4762.51 4854.96,4769.3 ; IC1.9@4813.71,4776.08 4854.96,4769.3 ; 3777,4137 v1(3808,4172) 3808,4168 3777,4137
  Bottom Layer w10: v1(3808,4172) 3808,4179.6 3844,4215.6 3844,4508 v1(3881,4545) 3844.79,4508.79 ; v1@3873.27,4551.35 3844.79,4508.79 ; v1@3887.35,4537.27 3844.79,4508.79
UART1_T: IC1.10 U5.68 | length 4571
  Top Layer w10: 2220.72,4470.15 U5.68@2220.72,4505.9 ; U5.68@2220.72,4545.15 2220.72,4319.38 2234,4306.1 2234,4202 2319,4117 3829,4117 3850,4138 ; v1@3836.25,4175.78 3850,4138 ; v1@3856,4177.75 3850,4138 ; v1@3885.65,4481.27 3928.21,4452.79 v1@3899.73,4495.35 ; v1(3892,4489) 3966,4415 4929.46,4415 4971,4456.54 4971,4742.54 4894.25,4819.3 IC1.10@4781.66,4819.3 ; IC1.10@4813.15,4819.3 4854.96,4819.3 ; IC1.10@4813.71,4812.51 4854.96,4819.3 ; IC1.10@4813.71,4826.08 4854.96,4819.3 ; 3850,4138 v1(3846,4178) 3850,4174 3850,4138
  Bottom Layer w10: v1@3840.67,4186.46 3862,4194 ; v1(3846,4178) 3862,4194 ; v1@3854.46,4172.67 3862,4194 ; v1@3884.14,4495.19 3862,4459 ; v1@3898.19,4481.14 3862,4459 ; 3862,4194 3862,4459 ; 3862,4459 v1(3892,4489) 3862,4459
UART2_E: IC2.2 IC2.3 R104.1 U5.57 | length 5906.6
  Top Layer w10: 2004.19,4470.15 U5.57@2004.19,4505.9 ; U5.57@2004.19,4545.15 2004.19,4202.71 2264.9,3942 4136,3942 4182,3988 4182,4168.4 4181,4169.4 4181,4262 4190,4271 5982.46,4271 6066.72,4355.27 IC2.2@6066.72,4492.05 ; IC2.2@6059.75,4458.47 6066.72,4417.05 ; IC2.2@6066.72,4459.05 6066.72,4417.05 ; IC2.2@6073.7,4458.47 6066.72,4417.05
  Top Layer w20: R104.1@5880.38,4562.39 5897.01,4579.02 6046.02,4579.02 ; R104.1@5882.85,4575.93 5974.66,4579.02 ; R104.1@5884.32,4562.39 5974.66,4579.02 ; R104.1@5887.77,4549.21 5974.66,4579.02 ; IC2.2@6066.72,4492.05 6066.72,4558.31 ; IC2.2@6066.72,4525.05 6066.72,4558.31 ; IC2.3@6116.72,4492.05 6116.72,4562.31 ; IC2.3@6116.72,4525.05 6116.72,4562.31 ; 6046.02,4579.02 6066.72,4558.31 ; 6046.02,4579.02 6100.02,4579.02 6116.72,4562.31
UART2_R: IC2.1 U5.56 | length 5527.2
  Top Layer w10: 1984.5,4470.15 U5.56@1984.5,4505.9 ; U5.56@1984.5,4545.15 1984.5,4196.94 2257.44,3924 4167,3924 4209,3966 v1(4209,4181) ; v1(4138,4276) 4151,4289 5975,4289 6016.72,4330.72 IC2.1@6016.72,4492.05 ; v1@4199.06,4179.89 4209,4136 v1@4218.94,4179.89 ; IC2.1@6009.75,4458.47 6016.72,4417.05 ; IC2.1@6016.72,4459.05 6016.72,4417.05 ; IC2.1@6023.7,4458.47 6016.72,4417.05
  Bottom Layer w10: v1(4138,4276) 4169,4276 ; v1@4139.61,4266.13 4169,4276 ; v1@4139.61,4285.87 4169,4276 ; v1@4199.06,4182.11 4209,4226 v1@4218.94,4182.11 ; v1(4209,4181) 4209,4236 4169,4276
UART2_T: IC2.4 U5.55 | length 5209.1
  Top Layer w10: 1964.82,4470.15 U5.55@1964.82,4505.9 ; U5.55@1964.82,4545.15 1964.82,4191.17 2249.99,3906 4178,3906 4290,4018 4290,4233 4310,4253 5991.72,4253 6166.72,4428 ; IC2.4@6159.77,4458.27 6166.72,4428 ; IC2.4@6166.72,4459.05 6166.72,4428 ; IC2.4@6166.72,4492.05 6166.72,4428 ; IC2.4@6173.68,4458.27 6166.72,4428
UART3_E: IC3.2 IC3.3 R105.1 U5.67 | length 5064.2
  Top Layer w10: 2201.04,4470.15 U5.67@2201.04,4505.9 ; U5.67@2201.04,4545.15 2201.04,4313.61 2216,4298.65 2216,4194.54 2320.54,4090 3835,4090 3887,4142 3887,4300.6 3911.4,4325 5625,4325 5658.22,4358.22 IC3.2@5658.22,4492.05 ; IC3.2@5651.25,4458.47 5658.22,4417.05 ; IC3.2@5658.22,4459.05 5658.22,4417.05 ; IC3.2@5665.2,4458.47 5658.22,4417.05
  Top Layer w20: R105.1@5476.94,4575.95 5566.67,4577.02 ; R105.1@5478.13,4562.39 5566.67,4577.02 ; R105.1@5481.37,4549.15 5566.67,4577.02 ; R105.1@5488.83,4577.02 5647.02,4577.02 ; IC3.2@5658.22,4492.05 5658.22,4565.81 ; IC3.2@5658.22,4525.05 5658.22,4565.81 ; IC3.3@5708.22,4492.05 5708.22,4555.81 ; IC3.3@5708.22,4525.05 5708.22,4555.81 ; 5647.02,4577.02 5658.22,4565.81 ; 5647.02,4577.02 5687.02,4577.02 5708.22,4555.81
UART3_R: IC3.1 U5.87 | length 4301.2
  Top Layer w10: U5.87@2425.44,4828.61 3327.61,4828.61 ; U5.87@2464.69,4828.61 2500.44,4828.61 ; v1@3339.24,4619.84 3391.03,4624 ; v1@3344.61,4600.67 3391.03,4624 ; v1@3350.15,4865.2 3327.61,4828.61 ; v1@3364.2,4851.15 3327.61,4828.61 ; IC3.1@5601.25,4458.47 5608.22,4417.05 ; IC3.1@5601.53,4457.02 5608.22,4447 ; IC3.1@5614.92,4457.02 5608.22,4447 ; IC3.1@5615.2,4458.47 5608.22,4417.05 ; 3327.61,4828.61 v1(3358,4859) 3327.61,4828.61 ; 3391.03,4624 v1(3341,4610) 3355,4624 3631,4624 3912,4343 5584,4343 5608.22,4367.22 5608.22,4447 ; 5608.22,4417.05 5608.22,4459.05 5608.22,4447
  Bottom Layer w10: v1@3335.55,4618.39 3358,4627 ; v1(3341,4610) 3358,4627 ; v1@3348.06,4857.89 3358,4814 v1@3367.94,4857.89 ; v1@3349.39,4604.55 3358,4627 ; v1(3358,4859) 3358,4627
UART3_T: IC3.4 U5.86 | length 4621.9
  Top Layer w10: U5.86@2425.44,4808.92 3623.92,4808.92 ; U5.86@2464.69,4808.92 2500.44,4808.92 ; v1@3653.63,4848.75 3623.92,4808.92 ; v1@3666.87,4833.91 3623.92,4808.92 ; v1@3919.96,4288.97 3952,4307 ; v1(3926,4281) 3952,4307 ; v1@3933.97,4274.96 3952,4307 ; IC3.4@5751.25,4458.47 5758.22,4417.05 ; IC3.4@5758.22,4459.05 5758.22,4417.05 ; IC3.4@5758.22,4492.05 5758.22,4345.22 5720,4307 3952,4307 ; IC3.4@5765.2,4458.47 5758.22,4417.05 ; 3623.92,4808.92 v1(3661,4842) 3659,4844 3623.92,4808.92
  Bottom Layer w10: v1(3661,4842) 3763,4842 3819.4,4785.6 3819.4,4611 3853.4,4577 3896,4577 3927,4546 v1@3927,4281 ; v1@3662.11,4832.06 3706,4842 v1@3662.11,4851.94 ; v1@3916.09,4282.33 3927,4326.03 ; v1(3926,4281) 3927,4326.03 ; v1@3935.96,4281.89 3927,4326.03
UART4_E: IC4.2 IC4.3 R106.1 U5.80 | length 3900.7
  Top Layer w10: U5.80@2425.44,4690.81 2426.38,4689.88 3641.49,4689.88 3934.37,4397 5077,4397 5126,4446 5126,4523 5165.31,4562.31 ; U5.80@2464.69,4690.81 2500.45,4689.88 ; R106.1@5068.01,4562.39 5228.92,4562.39 ; R106.1@5071.95,4562.39 5125.57,4562.39 ; R106.1@5072.64,4553.79 5125.57,4562.39 ; R106.1@5072.64,4570.98 5125.57,4562.39 ; R106.1@5075.18,4544.05 5125.57,4562.39 ; R106.1@5075.18,4580.72 5125.57,4562.39 ; IC4.2@5243.35,4522.16 5228.92,4562.39 ; IC4.2@5249.72,4492.05 5249.72,4542 ; IC4.2@5255.54,4528.95 5228.92,4562.39 ; 5228.92,4562.39 IC4.2@5249.72,4525.05 ; 5228.92,4562.39 5249.31,4542 ; 5249.31,4542 IC4.2@5249.72,4525.05 ; 5249.31,4542 5256.53,4526.67 5249.31,4542 ; 5249.31,4542 5242.84,4526.33 5249.31,4542 ; 5249.31,4542 IC4.2@5249.72,4525.05 ; 5249.31,4542 5249.72,4542 ; IC4.2@5249.72,4525.05 5249.72,4542 ; IC4.2@5249.72,4525.05 5249.72,4542 ; 5249.72,4542 5256.57,4526.5 5249.72,4542 ; 5249.72,4542 5242.87,4526.5 5249.72,4542
  Top Layer w20: IC4.2@5249.72,4492.05 IC4.3@5299.72,4492.05
UART4_R: IC4.1 U5.79 | length 3114
  Top Layer w10: U5.79@2426.28,4670.3 U5.79@2425.44,4671.13 2620.46,4671.13 ; U5.79@2464.69,4671.13 2500.44,4671.13 ; 2620.12,4671.88 3634.03,4671.88 3926.91,4379 5151.72,4379 5199.72,4427 ; IC4.1@5192.77,4458.29 5199.72,4427 ; IC4.1@5199.72,4459.05 5199.72,4427 ; IC4.1@5199.72,4492.05 5199.72,4427 ; IC4.1@5206.68,4458.29 5199.72,4427
UART4_T: IC4.4 U5.78 | length 3253.3
  Top Layer w10: U5.78@2426.38,4650.51 U5.78@2425.44,4651.44 3629.01,4651.44 3919.46,4361 5279,4361 5349.72,4431.72 ; U5.78@2464.69,4651.44 2500.44,4651.44 ; IC4.4@5342.78,4458.16 5349.72,4431.72 ; IC4.4@5349.72,4459.05 5349.72,4431.72 ; IC4.4@5349.72,4492.05 5349.72,4431.72 ; IC4.4@5356.67,4458.16 5349.72,4431.72
UH_DM3: J13.33 J13.34 | length 708.7
  Top Layer w20: J13.34@2502.25,369.51 J13.33@2502.25,448.25 ; J13.34@2502.25,371.86 J13.33@2515.82,449.43 ; J13.34@2502.65,374.18 J13.33@2529.39,448.25 ; J13.34@2528.98,374.18 J13.33@2502.25,448.25 ; J13.34@2529.39,369.51 J13.33@2529.39,448.25 ; J13.34@2529.39,371.86 J13.33@2515.82,449.43 ; J13.33@2502.25,448.25 J13.34@2515.82,370.69 ; J13.34@2515.82,370.69 J13.33@2529.39,448.25 ; J13.34@2515.82,370.69 J13.33@2515.82,449.43
UH_DP3: J13.31 J13.32 | length 708.7
  Top Layer w20: J13.32@2580.99,369.51 J13.31@2580.99,448.25 ; J13.32@2580.99,371.86 J13.31@2594.56,449.43 ; J13.32@2581.39,374.18 J13.31@2608.13,448.25 ; J13.32@2607.72,374.18 J13.31@2580.99,448.25 ; J13.32@2608.13,369.51 J13.31@2608.13,448.25 ; J13.32@2608.13,371.86 J13.31@2594.56,449.43 ; J13.31@2580.99,448.25 J13.32@2594.56,370.69 ; J13.32@2594.56,370.69 J13.31@2608.13,448.25 ; J13.32@2594.56,370.69 J13.31@2594.56,449.43
VDD1V8_EXT: J13.53 J13.54 | length 708.7
  Top Layer w20: J13.53@1714.84,448.25 J13.54@1728.41,370.69 ; J13.53@1714.84,450.6 J13.54@1714.84,371.86 ; J13.53@1715.25,445.93 J13.54@1741.99,371.86 ; J13.53@1741.58,445.93 J13.54@1714.84,371.86 ; J13.53@1741.99,448.25 J13.54@1728.41,370.69 ; J13.53@1741.99,450.6 J13.54@1741.99,371.86 ; J13.54@1714.84,371.86 J13.53@1728.41,449.43 ; J13.54@1728.41,370.69 J13.53@1728.41,449.43 ; J13.53@1728.41,449.43 J13.54@1741.99,371.86
VDD_ETHNET_1.8: J13.9 J13.10 | length 78.7
  Bottom Layer w50: J13.10@3460.7,370.69 J13.9@3460.7,449.43
VDD_TF: J13.37 J13.38 | length 708.7
  Top Layer w20: J13.37@2344.77,448.25 J13.38@2358.34,370.69 ; J13.37@2344.77,450.6 J13.38@2344.77,371.86 ; J13.37@2345.17,445.93 J13.38@2371.91,371.86 ; J13.37@2371.5,445.93 J13.38@2344.77,371.86 ; J13.37@2371.91,448.25 J13.38@2358.34,370.69 ; J13.37@2371.91,450.6 J13.38@2371.91,371.86 ; J13.38@2344.77,371.86 J13.37@2358.34,449.43 ; J13.38@2358.34,370.69 J13.37@2358.34,449.43 ; J13.37@2358.34,449.43 J13.38@2371.91,371.86
VSYS: J13.35 J13.36 | length 708.7
  Top Layer w20: J13.36@2423.51,369.51 J13.35@2423.51,448.25 ; J13.36@2423.51,371.86 J13.35@2437.08,449.43 ; J13.36@2423.91,374.18 J13.35@2450.65,448.25 ; J13.36@2450.24,374.18 J13.35@2423.51,448.25 ; J13.36@2450.65,369.51 J13.35@2450.65,448.25 ; J13.36@2450.65,371.86 J13.35@2437.08,449.43 ; J13.35@2423.51,448.25 J13.36@2437.08,370.69 ; J13.36@2437.08,370.69 J13.35@2450.65,448.25 ; J13.36@2437.08,370.69 J13.35@2437.08,449.43
XEINT7/GPX0_7: J13.39 J13.40 | length 708.7
  Top Layer w20: J13.39@2266.03,448.25 J13.40@2279.6,370.69 ; J13.39@2266.02,450.6 J13.40@2266.03,371.86 ; J13.39@2266.43,445.93 J13.40@2293.17,371.86 ; J13.39@2292.76,445.93 J13.40@2266.03,371.86 ; J13.39@2293.17,448.25 J13.40@2279.6,370.69 ; J13.39@2293.17,450.6 J13.40@2293.17,371.86 ; J13.40@2266.03,371.86 J13.39@2279.6,449.43 ; J13.40@2279.6,370.69 J13.39@2279.6,449.43 ; J13.39@2279.6,449.43 J13.40@2293.17,371.86
XMMC2CLK: J13.47 J13.48 | length 708.7
  Top Layer w20: J13.47@1951.06,448.25 J13.48@1964.64,370.69 ; J13.47@1951.06,450.6 J13.48@1951.06,371.86 ; J13.47@1951.47,445.93 J13.48@1978.21,371.86 ; J13.47@1977.8,445.93 J13.48@1951.06,371.86 ; J13.47@1978.21,448.25 J13.48@1964.64,370.69 ; J13.47@1978.21,450.6 J13.48@1978.21,371.86 ; J13.48@1951.06,371.86 J13.47@1964.64,449.43 ; J13.48@1964.64,370.69 J13.47@1964.64,449.43 ; J13.47@1964.64,449.43 J13.48@1978.21,371.86
XMMC2CMD: J13.45 J13.46 | length 708.7
  Top Layer w20: J13.45@2029.8,448.25 J13.46@2043.38,370.69 ; J13.45@2029.8,450.6 J13.46@2029.8,371.86 ; J13.45@2030.21,445.93 J13.46@2056.95,371.86 ; J13.45@2056.54,445.93 J13.46@2029.8,371.86 ; J13.45@2056.95,448.25 J13.46@2043.38,370.69 ; J13.45@2056.95,450.6 J13.46@2056.95,371.86 ; J13.46@2029.8,371.86 J13.45@2043.38,449.43 ; J13.46@2043.38,370.69 J13.45@2043.38,449.43 ; J13.45@2043.38,449.43 J13.46@2056.95,371.86
XMMC2DATA0: J13.49 J13.50 | length 708.7
  Top Layer w20: J13.49@1872.32,448.25 J13.50@1885.9,370.69 ; J13.49@1872.32,450.6 J13.50@1872.32,371.86 ; J13.49@1872.73,445.93 J13.50@1899.47,371.86 ; J13.49@1899.06,445.93 J13.50@1872.32,371.86 ; J13.49@1899.47,448.25 J13.50@1885.9,370.69 ; J13.49@1899.47,450.6 J13.50@1899.47,371.86 ; J13.50@1872.32,371.86 J13.49@1885.9,449.43 ; J13.50@1885.9,370.69 J13.49@1885.9,449.43 ; J13.49@1885.9,449.43 J13.50@1899.47,371.86
XMMC2DATA1: J13.51 J13.52 | length 708.7
  Top Layer w20: J13.51@1793.58,448.25 J13.52@1807.15,370.69 ; J13.51@1793.58,450.6 J13.52@1793.58,371.86 ; J13.51@1793.99,445.93 J13.52@1820.73,371.86 ; J13.51@1820.32,445.93 J13.52@1793.58,371.86 ; J13.51@1820.73,448.25 J13.52@1807.15,370.69 ; J13.51@1820.73,450.6 J13.52@1820.73,371.86 ; J13.52@1793.58,371.86 J13.51@1807.15,449.43 ; J13.52@1807.15,370.69 J13.51@1807.15,449.43 ; J13.51@1807.15,449.43 J13.52@1820.73,371.86
XMMC2DATA2: J13.41 J13.42 | length 708.7
  Top Layer w20: J13.41@2187.28,448.25 J13.42@2200.86,370.69 ; J13.41@2187.28,450.6 J13.42@2187.28,371.86 ; J13.41@2187.69,445.93 J13.42@2214.43,371.86 ; J13.41@2214.02,445.93 J13.42@2187.28,371.86 ; J13.41@2214.43,448.25 J13.42@2200.86,370.69 ; J13.41@2214.43,450.6 J13.42@2214.43,371.86 ; J13.42@2187.28,371.86 J13.41@2200.86,449.43 ; J13.42@2200.86,370.69 J13.41@2200.86,449.43 ; J13.41@2200.86,449.43 J13.42@2214.43,371.86
XMMC2DATA3: J13.43 J13.44 | length 708.7
  Top Layer w20: J13.43@2108.54,448.25 J13.44@2122.12,370.69 ; J13.43@2108.54,450.6 J13.44@2108.54,371.86 ; J13.43@2108.95,445.93 J13.44@2135.69,371.86 ; J13.43@2135.28,445.93 J13.44@2108.54,371.86 ; J13.43@2135.69,448.25 J13.44@2122.12,370.69 ; J13.43@2135.69,450.6 J13.44@2135.69,371.86 ; J13.44@2108.54,371.86 J13.43@2122.12,449.43 ; J13.44@2122.12,370.69 J13.43@2122.12,449.43 ; J13.43@2122.12,449.43 J13.44@2135.69,371.86
pads on no net: IC1.11 IC1.12 IC1.13 IC1.14 J1.0 J3.0 J4.0 J5.0 J6.7 J7.0 J8.0 J8.2 J9.0 J10.0 J11.0 J12.0 J13.25 J13.26 J13.55 J13.56 J13.57 J13.58 J13.59 J13.60 J14.1 J14.2 J14.3 J14.4 J14.5 J14.6 J14.16 J14.18 J14.19 J14.20 J14.21 J14.22 J14.24 J14.26 J14.28 J14.30 J14.31 J14.32 J14.34 J14.36 J14.38 J14.40 J15.0 J16.0 J17.7 J18.29 J18.30 J18.31 J18.32 J19.0 K1.2 K1.7 U4.1 U4.5 U4.7 U4.8 U5.6 U5.7 U5.8 U5.9 U5.13 U5.18 U5.51 U5.70 U5.71 U5.73 U6.4 U6.5 U6.12 U6.13 Y1.1

## Keep-outs
Keep-Out Layer:
  lines w5: -538,5701 -538,6044.81 -393.7,6044.81 6655,6044.81 6655,5874 6951,5874 6951,6044.81 6989,6044.81 7624.61,6044.81 7624.61,5701 7480.31,5701 7479,5701 7479,2308 7479,2174 6939,2174 6939,805 7480.31,805 7480.31,139.3 7480.31,-152 6707.61,-152 6707.61,139.3 379,139.3 379,-152 -393.7,-152 -393.7,139.3 -393.7,1488 -392,1488 -253,1488 -253,2335 -393.7,2335 -393.7,2433 -393.7,5701 -538,5701

## Dimensions
-393.7,-152 to -393.7,6044.81 on Keep-Out Layer
-393.7,-152 to 7480.31,-152 on Keep-Out Layer

## Text inside footprints (layer, text, board x,y; h text height)
Q3: Mechanical 9 "3" at 5259.55,890.8 h25 r90; Mechanical 9 "1" at 5167.05,928.8 h25 r90; Mechanical 9 "2" at 5167.05,853.8 h25 r90
Q5: Mechanical 9 "3" at 5264.55,1230.8 h25 r90; Mechanical 9 "1" at 5172.05,1268.8 h25 r90; Mechanical 9 "2" at 5172.05,1193.8 h25 r90
U1: Top Overlay "5" at 5507.96,2405.46 h50 r180; Top Overlay "1" at 5887.96,2405.46 h50 r180
U3: Top Overlay "5" at 5824.51,3481.73 h50; Top Overlay "1" at 5444.51,3481.73 h50